# EAGLE board BTN MASHR Front Panel v1.5 (EAGLE 7.2.0)

Size 60.96 x 43.18 mm. Coordinates in mm from the lower left corner, seen from the top.
Outline: 0,0 60.96,0 60.96,43.18 0,43.18 0,0
Copper layers (1*16): Top 0.035mm / dielectric 1.5mm / Bottom 0.035mm
Design rules "default": minimum track width 10mil, minimum drill 24mil, track to track 8mil, track to pad 8mil, pad to pad 8mil, via to via 8mil, smd to smd 8mil, copper to edge 40mil, drill to drill 8mil, minimum pad ring 10mil, minimum via ring 8mil, stop-mask expansion 4mil, vias tented up to drill 0mil, thermal gap 10mil
Holes 3.17 mm at 4.95,3 4.95,40.18 55.75,40.18 55.75,3
Holes 25.4 mm at 13.97,21.59
Holes 6.35 mm at 54.1,28.32 54.1,14.86 39.88,26.92

## Placement (x,y rotation side)
E$1  [OSHW-LOGO-M]  26.65,3.11 0 top
E$2  [PCB_SM_CYCLONE]  34.31,3.56 0 top
E$3  [OSHW-LOGO-M]  26.65,40.07 180 bottom
E$4  [PCB_SM_CYCLONE]  34.31,39.62 180 bottom

## Library data of the parts
E$1 E$3 = SparkFun-Aesthetics
E$2 E$4 = tsyklon-pcb-graphics

## Text on the board
tPlace: BTN MASHR | IN | OUT
bPlace: IN | OUT | BTN MASHR